# Altium PCB reverse_pol_protection.PcbDoc
Units mm, origin at the board's own origin, x right, y up, seen from the top; angles counter-clockwise.
Board outline 20.7 x 50.42 mm, 2 copper layers (Top Layer, Bottom Layer); 12 components, 6 nets, 25 pads, 1 vias.
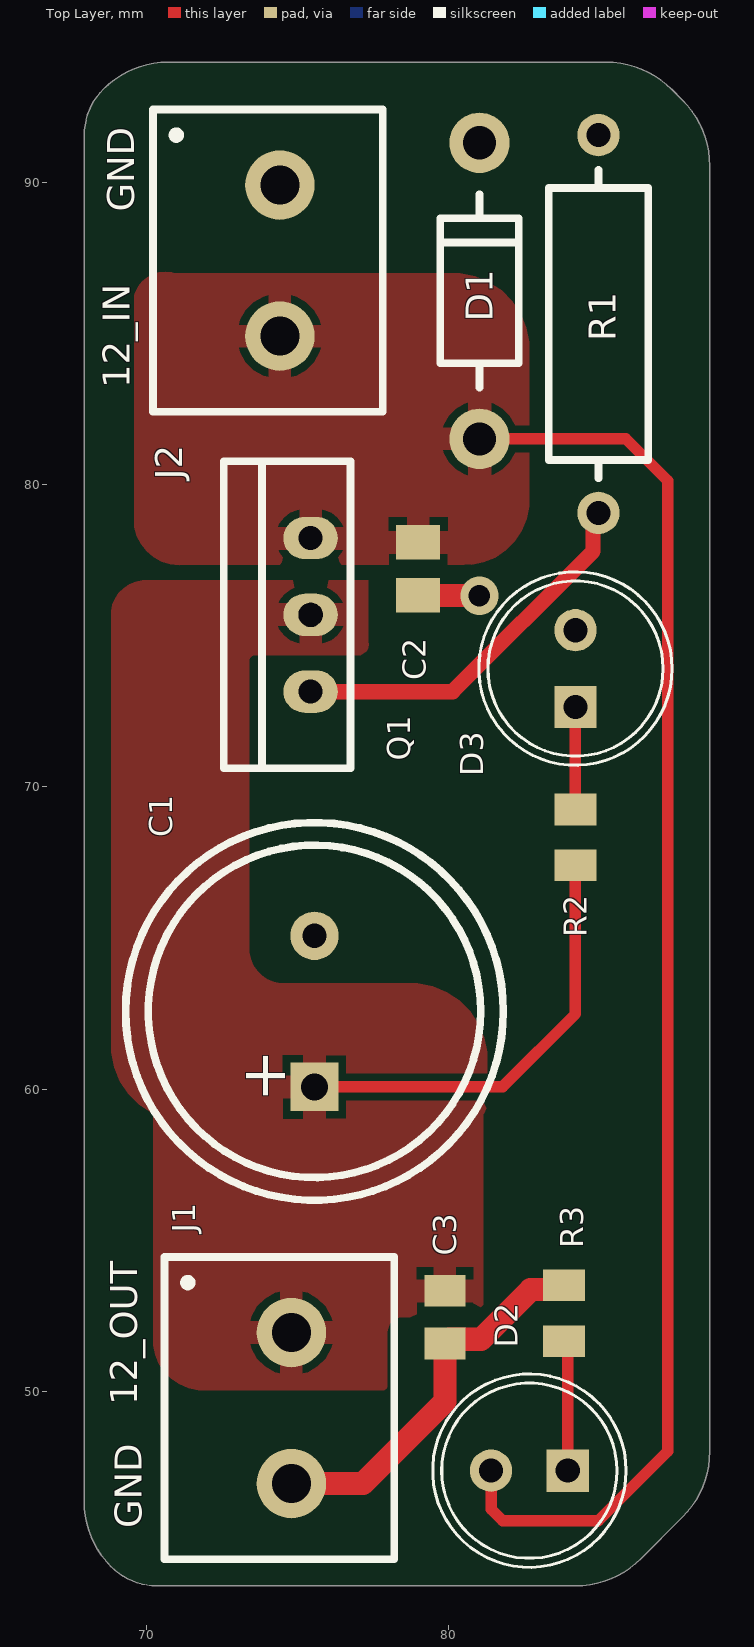
[diagram p0: Top Layer view]
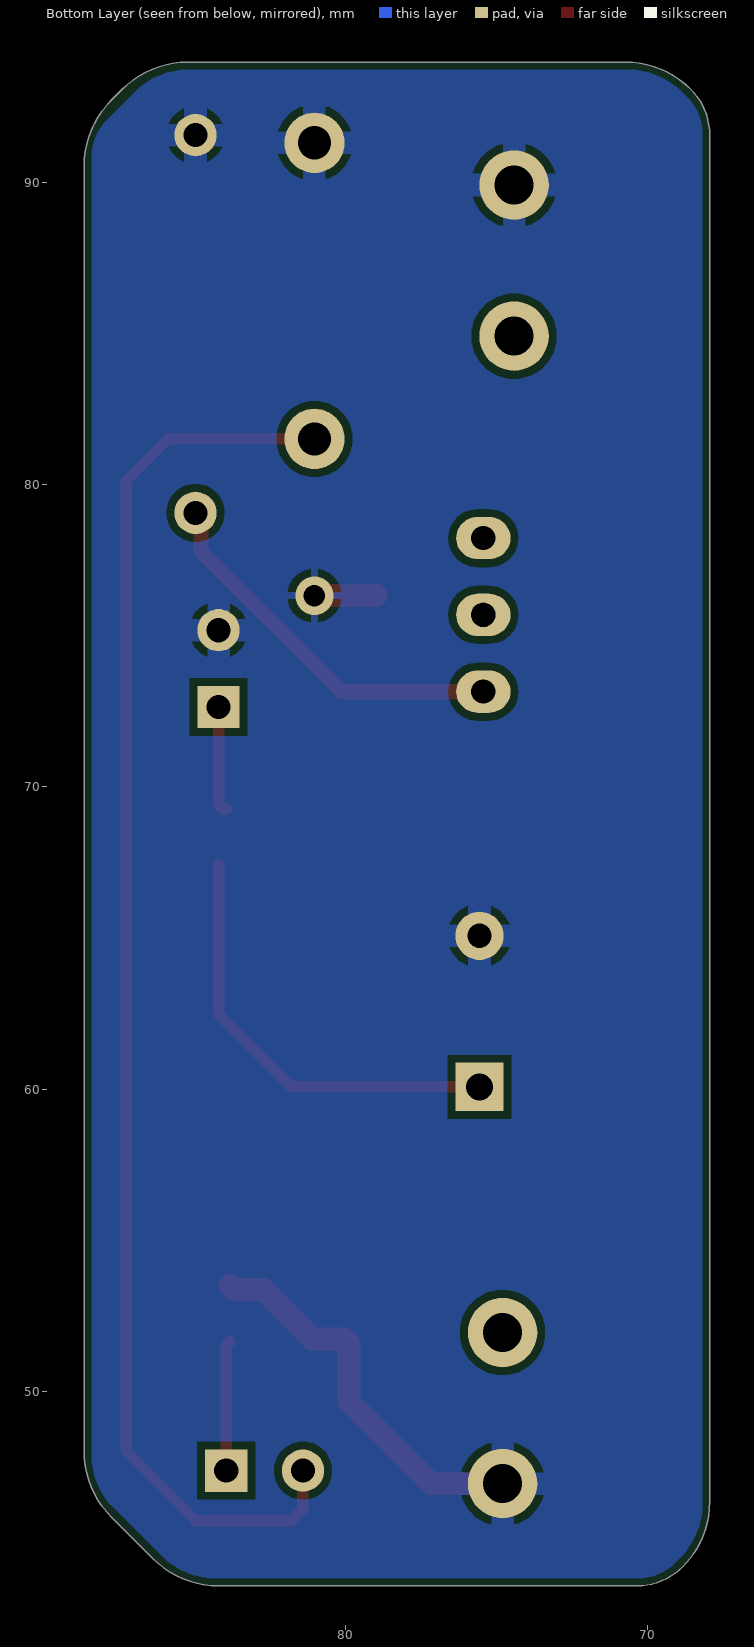
[diagram p1: Bottom Layer view, seen from below]

## Layer stack, top to bottom
Top Solder: solder mask 0.0102, Solder Resist, Dk 3.5
Top Layer: signal copper 0.0356
Dielectric 1: dielectric 0.32, FR-4, Dk 4.8
Bottom Layer: signal copper 0.0356
Bottom Solder: solder mask 0.0102, Solder Resist, Dk 3.5

## Board outline
68.843,44.187 cw(c71.011,46.355) 67.945,46.355 67.945,91.558 cw(c70.113,91.558) 68.58,93.091 cw(c70.726,90.945) 70.726,93.98 85.217,93.98 cw(c85.217,90.914) 87.385,93.082 87.748,92.719 cw(c85.58,90.551) 88.646,90.551 88.646,48.006 cw(c85.58,48.006) 87.748,45.838 86.369,44.459 cw(c84.201,46.627) 84.201,43.561 70.354,43.561 cw(c70.354,45.698)

## Design rules (kind name [scope] priority, off if disabled: settings)
AssemblyTestPointUsage [All] p1: isadvanced=TRUE
AssemblyTestpoint [All] p1: isadvanced=TRUE testpointundercomponent=TRUE minsize=1.016 maxsize=2.54 preferedsize=1.524 minholesize=0 maxholesize=1.016 preferedholesize=0.813 testpointgrid=0.025 usegrid=TRUE gridtolerance=0 allowsidetop=TRUE allowsidebottom=TRUE
Clearance Clearance_1 [OnMid vs OnMid] p1: gap=0.254 ignorepadtopadclearanceinfootprint=FALSE sourcerule=38 cellrowname=All cellrowtype=0 cellcolname=All cellcoltype=0 innerlayers=TRUE
Clearance Clearance_2 [(ExistsOnLayer('Top Layer') Or ExistsOnLayer('Bottom Layer')) vs (ExistsOnLayer('Top Layer') Or ExistsOnLayer('Bottom Layer'))] p2: gap=0.254 ignorepadtopadclearanceinfootprint=FALSE sourcerule=38 cellrowname=All cellrowtype=0 cellcolname=All cellcoltype=0 outerlayers=TRUE
Clearance [All] p3: gap=0.254 ignorepadtopadclearanceinfootprint=FALSE ismatrix=TRUE
ComponentClearance [All] p1: isadvanced=TRUE gap=0.254 collisioncheckmode=3 verticalgap=0.254 showdistances=FALSE
FabricationTestPointUsage [All] p1: isadvanced=TRUE valid=0 allowmultiple=FALSE
FabricationTestpoint [All] p1: isadvanced=TRUE side=3 testpointundercomponent=TRUE minsize=1.016 maxsize=2.54 preferedsize=1.524 minholesize=0 maxholesize=1.016 preferedholesize=0.813 testpointgrid=0.025 allowsidetop=TRUE allowsidebottom=TRUE usegrid=TRUE gridtolerance=0
FanoutControl Fanout_BGA [IsBGA] p1: isadvanced=TRUE bgadir=Out bgaviamode=Centered fanoutstyle=Auto fanoutdirection=Alternating viagrid=0.025 // Fanout_BGA (Default Rule)
FanoutControl Fanout_LCC [IsLCC] p2: isadvanced=TRUE bgadir=Out bgaviamode=Centered fanoutstyle=Auto fanoutdirection=Alternating viagrid=0.025 // Fanout_LCC (Default Rule)
FanoutControl Fanout_SOIC [IsSOIC] p3: isadvanced=TRUE bgadir=Out bgaviamode=Centered fanoutstyle=Auto fanoutdirection=Alternating viagrid=0.025 // Fanout_SOIC (Default Rule)
FanoutControl Fanout_Small [(CompPinCount < 5)] p4: isadvanced=TRUE bgadir=Out bgaviamode=Centered fanoutstyle=Auto fanoutdirection=OutThenIn viagrid=0.025 // Fanout_Small (Default Rule)
FanoutControl Fanout_Default [All] p5: isadvanced=TRUE bgadir=Out bgaviamode=Centered fanoutstyle=Auto fanoutdirection=Alternating viagrid=0.025 // Fanout_Default (Default Rule)
Height [All] p1: isadvanced=TRUE minheight=0 maxheight=25.4 prefheight=12.7
HoleSize [All] p1: isadvanced=TRUE absolutevalues=TRUE maxlimit=2.54 minlimit=0.025 maxpercent=80.000 minpercent=20.000
HoleToHoleClearance [All] p1: isadvanced=TRUE gap=0.254 allowstackedmicrovias=TRUE
LayerPairs [All] p1: isadvanced=TRUE enforce=TRUE
MinimumSolderMaskSliver [All] p1: isadvanced=TRUE minsoldermaskwidth=0.254
NetAntennae [All] p1: isadvanced=TRUE netantennaetolerance=0
PasteMaskExpansion [All] p1: isadvanced=TRUE expansion=0
PlaneClearance [All] p1: isadvanced=TRUE clearance=0.508
PlaneConnect [All] p1: isadvanced=TRUE planeconnectstyle=Relief reliefexpansion=0.508 reliefentries=4 reliefconductorwidth=0.254 reliefairgap=0.254
PolygonConnect PolygonConnectStyle_1 [All] p1: isadvanced=TRUE thpad.connectstyle=Relief thpad.reliefconductorwidth=0.762 thpad.reliefentries=4 thpad.polygonreliefangle="90 Angle" thpad.airgapwidth=0.254 smdpad.connectstyle=Relief smdpad.reliefconductorwidth=0.762 smdpad.reliefentries=4 smdpad.polygonreliefangle="90 Angle" smdpad.airgapwidth=0.254 via.connectstyle=Relief via.reliefconductorwidth=0.254 via.reliefentries=2 via.polygonreliefangle="0 Angle" via.airgapwidth=0.254
PolygonConnect [All] p2: thpad.connectstyle=Relief thpad.reliefconductorwidth=0.254 thpad.reliefentries=4 thpad.polygonreliefangle="90 Angle" thpad.airgapwidth=0.762 smdpad.connectstyle=Relief smdpad.reliefconductorwidth=0.254 smdpad.reliefentries=4 smdpad.polygonreliefangle="90 Angle" smdpad.airgapwidth=0.254 via.connectstyle=Relief via.reliefconductorwidth=0.254 via.reliefentries=4 via.polygonreliefangle="90 Angle" via.airgapwidth=0.254
RoutingCorners [All] p1: isadvanced=TRUE cornerstyle=45-Degree minsetback=2.54 maxsetback=2.54
RoutingPriority [All] p1: isadvanced=TRUE routingpriority=0
RoutingVias [All] p1: holewidth=0.711 width=1.27 viastyle="Through Hole" minholewidth=0.711 minwidth=1.27 maxholewidth=0.711 maxwidth=1.27
ShortCircuit [All] p1: isadvanced=TRUE allowed=FALSE
SilkToSilkClearance [All] p1: isadvanced=TRUE silktosilkclearance=0.254
SilkToSolderMaskClearance [IsPad] p1: isadvanced=TRUE minsilkscreentomaskgap=0.254 clearancetoexposedcopper=TRUE
SolderMaskExpansion [All] p1: isadvanced=TRUE expansion=0 istentingtop=FALSE
SupplyNets "Schematic Supply Nets" [InNet('GND')] p1: isadvanced=TRUE voltage=0.000
UnRoutedNet [All] p1: isadvanced=TRUE
UnpouredPolygon [All] p1: isadvanced=TRUE
Width [All] p1: maxlimit=2.794 minlimit=0.254 preferedwidth=0.254 minimp=50.000000 maximp=50.000000 favimp=50.000000
4 further rules are at their usual default settings.

## Components (designator, comment, footprint, x,y, rotation, side; value= is the part's Value field where it differs from the comment)
C1 "1000uF" RUBYCON_CAP_12.5x25 75.565,60.071 r90 top
C2 "4.7nF" YAGEO_CAP_0805_EA 78.994,77.216 r270 top
C3 "100nF" YAGEO_CAP_0805_E0 79.883,52.451 r90 top
D1 "Zener" NEXPERIA_DO-41 81.026,91.313 r270 top
D2 "LED" KINGBRIGHT_LED_THT_H4.9 83.947,47.371 r180 top
D3 "LED" KINGBRIGHT_LED_THT_H4.9 84.201,72.644 r90 top
J1 "?" KEFA_TERMINAL_2POS 74.803,51.943 r270 top
J2 "?" KEFA_TERMINAL_2POS 74.422,89.916 r270 top
Q1 "P_MOSFET" INFINEON_TO220-3 75.438,75.692 r90 top
R1 "680R" YAGEO_RES_THT_P12.5 84.963,91.567 r270 top
R2 "1k" Yageo_RES_0805 84.201,68.326 r270 top
R3 "1k" Yageo_RES_0805 83.82,52.578 r90 top

## Footprints (in the part's own frame and the unit in brackets; to place one, negate y for a bottom-side part, rotate by r counter-clockwise, add the part's x,y. Pads: shape width x height; smd on the part's side, far side on the other; paste and mask are expansions set on the pad)
INFINEON_TO220-3 [mm] "TO220 Package - IRF4905PFB, IPC Medium Density, No heatsink"
  oval 1.4x1.8 hole 0.8: D(0,0) G(-2.54,0) S(2.54,0)
  silkscreen extent -5.08,-1.32 5.08,2.88
KEFA_TERMINAL_2POS [mm] "Through-Hole Package, P5mm, IPC Medium Density"
  round 2.3 hole 1.3: 1(0,0) 2(5,0)
  silkscreen extent -2.5,-4.2 7.5,3.4
KINGBRIGHT_LED_THT_H4.9 [mm] "IPC Medium Density, P3mm, Body 3.2mm"
  rect 1.4x1.4 hole 0.8: A(0,0)
  round 1.4 hole 0.8: K(2.54,0)
  silkscreen extent -1.93,-3.2 4.47,3.2
NEXPERIA_DO-41 [mm] "SOD66 Package (DO-41), Zener (1N4729A - 1N4748A), Glass Package, Axial leaded"
  round 2 hole 1.1: A(9.8,0) K(0,0)
  silkscreen extent 1.7,-1.3 8.1,1.3
RUBYCON_CAP_12.5x25 [mm] "Electrolytic Cap, THT_Package, 12.5x25mm body"
  rect 1.6x1.6 hole 0.9: 1(0,0)
  round 1.6 hole 0.8: 2(5,0)
  silkscreen extent -3.75,-6.25 8.75,6.25
YAGEO_CAP_0805_E0 [mm] "SMD_Package, EO-dimensions, Body 2.1x1.35max, IPC Medium Density"
  rect 1.05x1.35 smd: 1(-0.875,0) 2(0.875,0)
  body extent -1.05,-0.67 1.05,0.67, height 0.7
YAGEO_CAP_0805_EA [mm] "SMD_Package, EA-dimensions, Body 2.2x1.45max, IPC Medium Density"
  rect 1.15x1.45 smd: 1(-0.875,0) 2(0.875,0)
  body extent -1.1,-0.72 1.1,0.72, height 0.7
Yageo_RES_0805 [mm] "SMD_Package_0805, IPC Medium Density"
  rect 1.05x1.4 smd: 1(-0.925,0) 2(0.925,0)
  body extent -1.05,-0.67 1.05,0.67, height 0.6
YAGEO_RES_THT_P12.5 [mm] "Through-Hole Package, IPC Medium Density, P10.0mm, CFR-50 & CR51WS"
  round 1.4 hole 0.8: 1(0,0) 2(12.5,0)
  silkscreen extent 1.15,-1.65 11.35,1.65

## Part data
C1: library part Cap_Elec, "Generic Electrolytic Capacitor"
C2 C3: library part Cap_Ceramic, "Generic Ceramic Capacitor"
D1: "Generic Zener Diode"
D2 D3: "Generic Light Emitting Diode, Circuit indication"
J1 J2: library part "Terminal Block", "Generic 2 position terminal block"
Q1: "Infineon P-Channel MOSFET"
R1: library part Resistor_L, "Generic Resistor, Power > 1W"
R2 R3: library part Resistor_S, "Generic Resistor, Power <= 1W"

## Via types
v1: diameter 1.27, hole 0.711, Top Layer to Bottom Layer, 1 vias

## Nets (pads, with @x,y where several pads share a name; then routed paths per layer and width w, separated by ;. In a path a pad name is that pad's centre, name@x,y a point inside that pad or via, vN(x,y) a via of type N, cw(c..) or ccw(c..) an arc to the next point about the centre after c; other vN are vias at no path point)
GND: C1.2 C2.2 C3.1 D1.K D3.K J1.2 J2.1 R1.1 R3.2 | length 14.9
  Top Layer w0.762: J1.2 77.169,46.943 79.883,49.657 C3.1 80.027,51.72 81.078,51.72 82.717,53.359 83.676,53.359 R3.2 ; C2.2 79.001,76.334 81.019,76.334 v1(81.026,76.327)
NetD2_A: D2.A R3.1 | length 4.3
  Top Layer w0.381: R3.1 83.947,51.526 D2.A
NetD3_A: D3.A R2.1 | length 3.5
  Top Layer w0.381: R2.1@83.947,69.251 ccw(c83.947,69.505) 84.201,69.505 D3.A
NetQ1_G: Q1.G R1.2 | length 12.6
  Top Layer w0.508: Q1.G 80.137,73.152 84.78,77.795 84.78,78.884 R1.2
V12_IN: C2.1 D1.A D2.K J2.2 Q1.S | length 47.1
  Top Layer w0.381: D1.A 85.873,81.513 87.249,80.137 87.249,48.006 84.963,45.72 81.788,45.72 81.409,46.099 81.409,47.369 D2.K
V12_OUT: C1.1 C3.2 J1.1 Q1.D R2.2 | length 14.6
  Top Layer w0.381: C1.1 81.788,60.071 84.201,62.484 R2.2

## Polygon pours and split planes (outlines as drawn)
V12_IN on Top Layer "V12_IN_L01_P004" (solid, pour order 4): 70.939,86.995 80.137,86.995 cw(c80.137,84.455) 82.677,84.455 82.677,79.502 cw(c80.518,79.502) 80.518,77.343 71.247,77.343 cw(c71.12,78.867) 69.596,78.74 69.596,86.272 cw(c70.63,85.961)
V12_OUT on Top Layer "V12_OUT_L01_P003" (solid, pour order 3): 77.343,76.835 77.343,74.803 cw(c76.994,74.708) 77.089,74.358 73.596,74.358 ccw(c73.596,74.168) 73.406,74.168 73.406,64.643 ccw(c74.549,64.643) 74.549,63.5 78.74,63.5 cw(c78.74,60.96) 81.28,60.96 81.28,59.563 cw(c80.645,59.563) 80.645,58.928 71.374,58.928 cw(c71.374,61.468) 68.834,61.468 68.834,75.692 cw(c69.977,75.692) 69.977,76.835
V12_OUT on Top Layer "V12_OUT_L01_P002" (solid, pour order 2): 77.851,50.038 71.882,50.038 cw(c71.882,51.689) 70.231,51.689 70.231,59.817 cw(c71.882,59.817) 71.882,61.468 78.613,61.468 cw(c78.613,58.928) 81.153,58.928 81.153,52.832 cw(c80.772,52.832) 80.772,52.451 78.486,52.451 ccw(c78.486,51.943) 77.978,51.943 77.978,50.165 cw(c77.851,50.165)
GND on Bottom Layer "GND_L02_P000" (solid, pour order 0): 68.199,46.264 ccw(c70.739,46.264) 68.943,44.468 69.088,44.323 ccw(c70.314,45.549) 70.314,43.815 84.292,43.815 ccw(c84.292,46.355) 86.088,44.559 87.674,46.145 ccw(c85.939,47.879) 88.392,47.879 88.392,90.849 ccw(c86.658,90.849) 87.884,92.075 86.951,93.008 ccw(c85.217,91.273) 85.217,93.726 70.648,93.726 ccw(c70.648,91.186) 68.852,92.982 68.707,92.837 ccw(c69.933,91.611) 68.199,91.611 68.199,89.916

## Silkscreen, mask and mechanical layers (free items; w line width, h text height)
Top Overlay:
  text "GND" at 69.596,89.027 h0.89 r90
  text "12_IN" at 69.448,83.185 h0.89 r90
  text "12_OUT" at 69.702,49.53 h0.89 r90
  text "GND" at 69.85,45.466 h0.89 r90
Mechanical 1:
  lines w0.254: 67.945,46.355 ccw(c71.011,46.355) 68.843,44.187 ccw(c70.354,45.698) 70.354,43.561 84.201,43.561 ccw(c84.201,46.627) 86.369,44.459 87.748,45.838 ccw(c85.58,48.006) 88.646,48.006 88.646,90.551 ccw(c85.58,90.551) 87.748,92.719 87.385,93.082 ccw(c85.217,90.914) 85.217,93.98 70.726,93.98 ccw(c70.726,90.945) 68.58,93.091 ccw(c70.113,91.558) 67.945,91.558 67.945,87.503 67.945,46.355

## Text inside footprints (layer, text, board x,y; h text height)
C1: Top Overlay "+" at 74.6,59.563 h1.52 r90